# EAGLE board PROJECT[1]. (EAGLE 9.6.2)
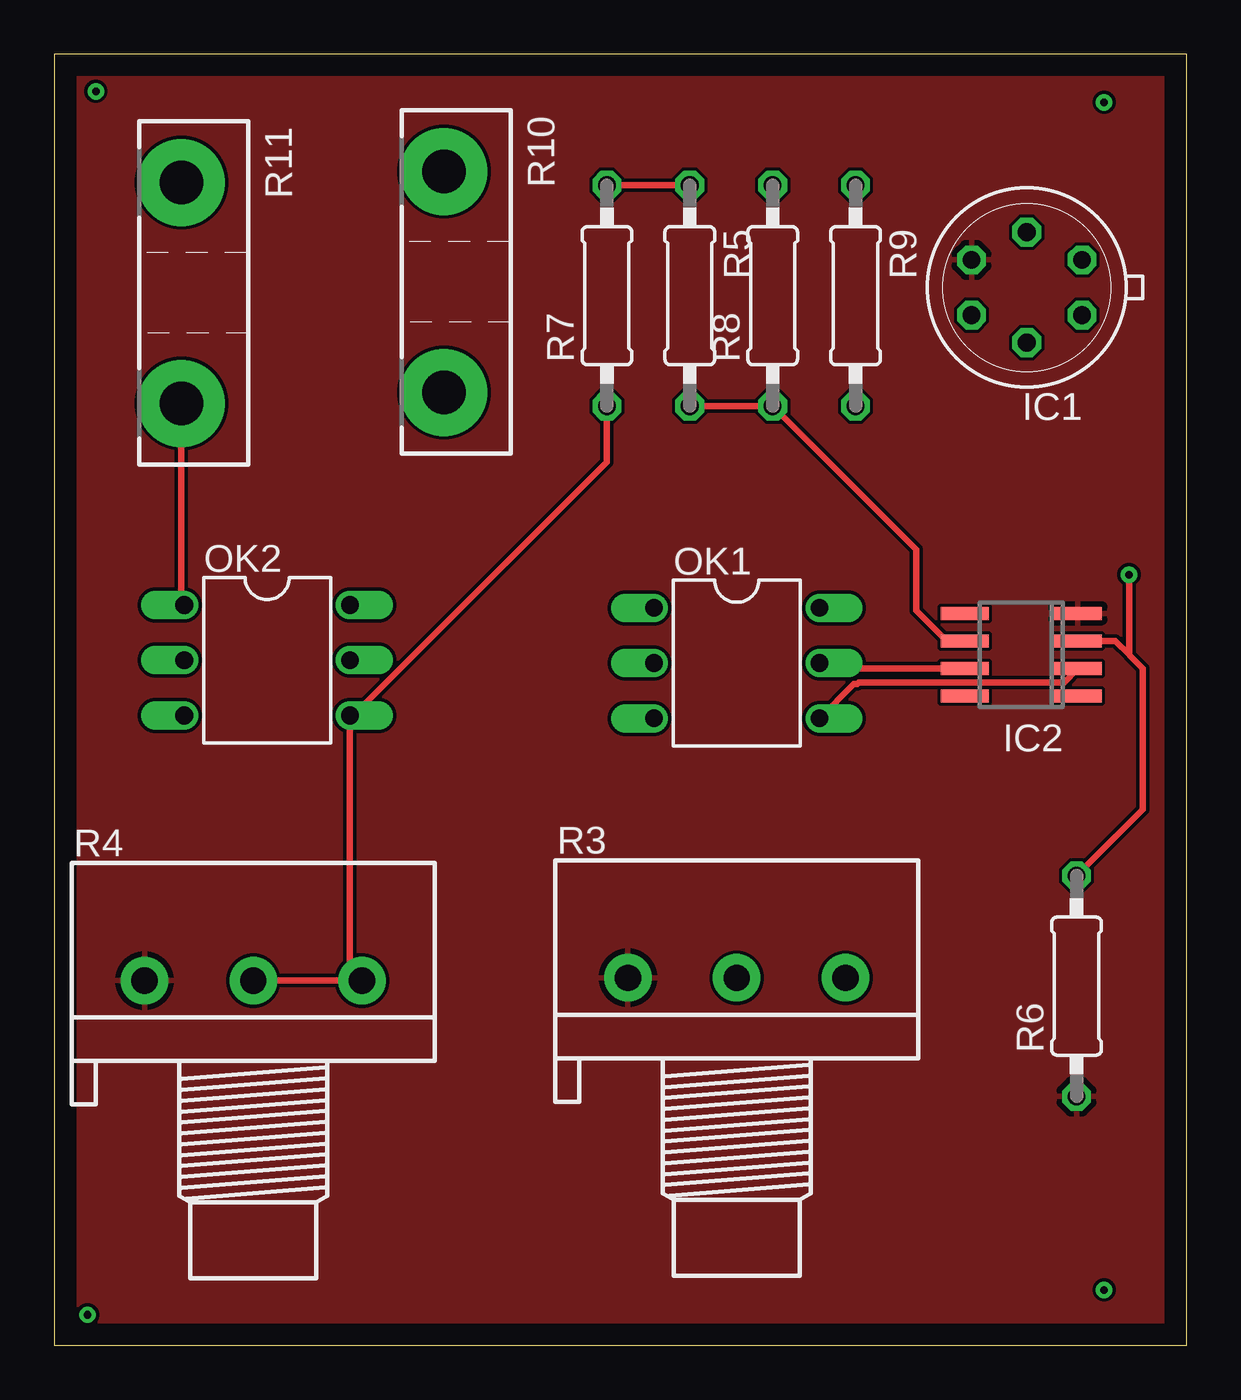
[diagram p0: board, top side]
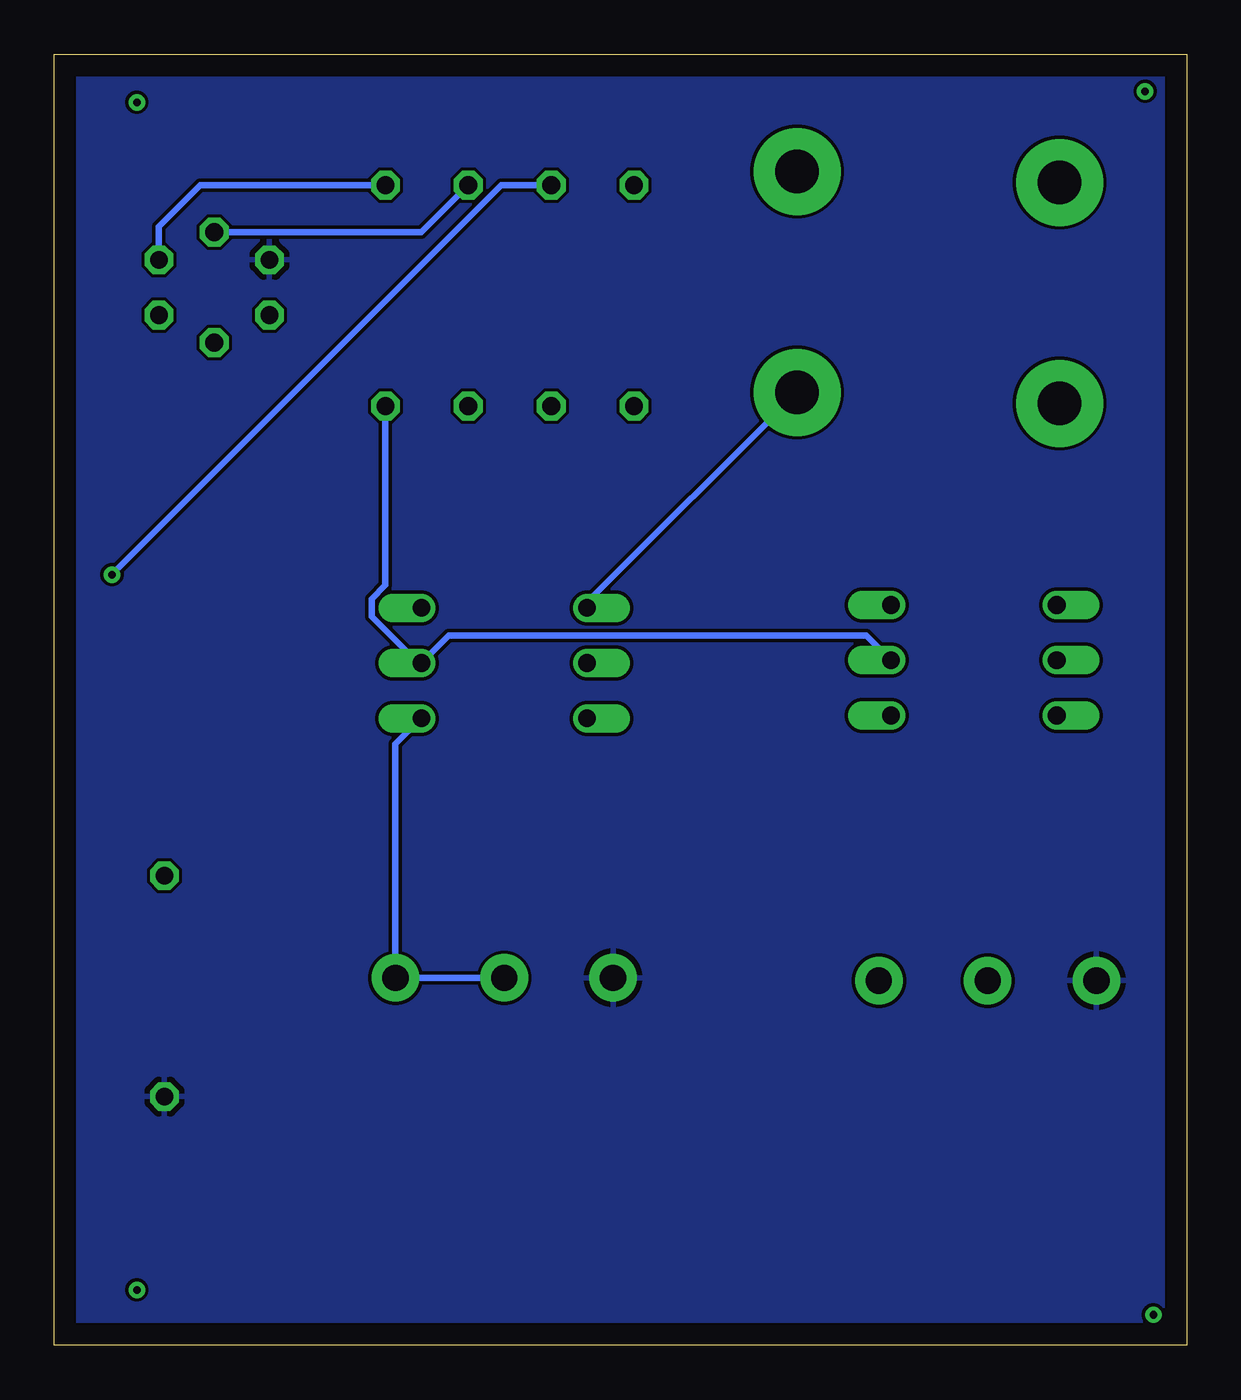
[diagram p1: board, bottom side, seen from below]

Size 52.05 x 59.36 mm. Coordinates in mm from the lower left corner, seen from the top.
Outline: 0,0 52.05,0 52.05,59.36 0,59.36 0,0
Copper layers (1*16): Top 0.035mm / dielectric 1.5mm / Bottom 0.035mm
Design rules "default": minimum track width 6mil, minimum drill 0.35mm, track to track 6mil, track to pad 6mil, pad to pad 6mil, via to via 6mil, smd to smd 6mil, copper to edge 40mil, drill to drill 6mil, minimum pad ring 10mil, minimum via ring 8mil, stop-mask expansion 4mil, vias tented up to drill 0mil, thermal gap 10mil

## Footprints (pad centres in the part's own frame; a part is rotated, then mirrored left to right if it is on the bottom)
TO78 = drill 0.813 octagon: 1 -2.54,-1.27; 2 0,-2.54; 3 2.54,-1.27; 4 2.54,1.27; 5 0,2.54; 6 -2.54,1.27
SO8 = smd 0.6 x 2.2: 1 -1.905,-2.6; 2 -0.635,-2.6; 3 0.635,-2.6; 4 1.905,-2.6; 5 1.905,2.6; 6 0.635,2.6; 7 -0.635,2.6; 8 -1.905,2.6
DIL06 = drill 0.813 offset: 1 -2.54,-3.81; 2 0,-3.81; 3 2.54,-3.81; 4 2.54,3.81; 5 0,3.81; 6 -2.54,3.81
3RP/1610N = drill 1.2 pad 2.184: 1 -5,0; 2 0,0; 3 5,0
0207/10 = drill 0.813 octagon: 1 -5.08,0; 2 5.08,0
TO-247-2V = drill 2 pad 4: 1 -5.08,0; 2 5.08,0

## Placement (x,y rotation side)
IC1  MAT-02H  [TO78]  44.7,48.64 180 top
IC2  AD8519R  [SO8]  44.45,31.75 90 top
OK1  4N35  [DIL06]  31.37,31.37 270 top
OK2  4N35  [DIL06]  9.78,31.5 270 top
R3  [3RP/1610N]  31.37,16.89 0 top
R4  [3RP/1610N]  9.14,16.76 0 top
R5  2.8k  [0207/10]  29.21,48.26 270 top
R6  14k  [0207/10]  46.99,16.51 90 top
R7  1k  [0207/10]  25.4,48.26 90 top
R8  12k  [0207/10]  33.02,48.26 90 top
R9  1.2k  [0207/10]  36.83,48.26 270 top
R10  100K 10W  [TO-247-2V]  17.91,48.89 270 top
R11  100K 10W  [TO-247-2V]  5.84,48.39 270 top

## Library data of the parts
IC1 = linear
IC2 = analog-devices; MPN: AD8519ARZ; OC_FARNELL: 9603840; OC_NEWARK: 19M8912
OK1 OK2 = optocoupler; MF: FAIRCHILD SEMICONDUCTOR; MPN: 4N35; OC_FARNELL: 1328375; OC_NEWARK: 72K9946
R3 R4 = pot
R5-R9 = rcl; SPICEPREFIX: R
R10 R11 = resistor-power; OC_FARNELL: unknown; OC_NEWARK: unknown

## Nets
12V: IC2.7 OK1.5 OK2.5 R9.2
BAT_LV: OK2.4 R4.2 R4.3 R7.1
GND: IC1.3 IC2.4 R3.1 R4.1 R6.1
HV+: R11.1
HV-: OK2.2
MC+: R10.1
MC-: OK1.2
MC_LV: IC2.2 OK1.4 R3.2 R3.3
N$1: OK1.1 R10.2
N$2: OK2.1 R11.2
N$3: IC2.3 R5.1 R6.2 R7.2
N$4: IC2.6 R5.2 R8.1
N$7: IC1.2 R8.2
V_OUT: IC1.1 R9.1

## Tracks (layer width: path | path; a pad name or v marks a point on that pad's centre or on a via)
12V
  Top 0.305: IC2.7 35.43,31.11 OK1.5
  Bottom 0.305: R9.2 36.83,34.94 37.47,34.31 37.47,33.51 35.33,31.37 OK1.5 33.91,32.64 14.73,32.64 OK2.5
BAT_LV
  Top 0.305: R4.2 R4.3 13.59,17.32 OK2.4 13.74,28.96 25.4,40.62 R7.1
GND
  pour Top: 54.61,62.23 -2.54,62.23 -2.54,-2.54 54.61,-2.54
  pour Bottom: 55.88,63.5 -3.81,63.5 -3.81,-3.81 55.88,-3.81
MC_LV
  Top 0.305: IC2.2 46.41,30.48 36.98,30.48 36.9,30.4 36.75,30.4 OK1.4
  Bottom 0.305: R3.2 R3.3 36.37,27.64 OK1.4
N$1
  Bottom 0.305: R10.2 27.56,34.16 OK1.1
N$2
  Top 0.305: R11.2 5.84,34.16 OK2.1
N$3  (via drill 0.35)
  Top 0.305: R7.2 R5.1 | IC2.3 48.77,32.38 49.4,31.75 | R6.2 50.04,24.64 50.04,31.11 49.47,31.69 49.4,31.75 | v49.4,35.43 49.4,31.75
  Bottom 0.305: R5.1 31.5,53.34 v49.4,35.43
N$4
  Top 0.305: R5.2 R8.1 39.62,36.58 39.62,33.78 41.02,32.38 IC2.6
N$5  (via drill 0.35)
  other vias: 48.26,2.54
N$6  (via drill 0.35)
  other vias: 48.26,57.15
N$7
  Bottom 0.305: R8.2 35.18,51.18 IC1.2
N$8  (via drill 0.35)
  other vias: 1.91,57.66
N$9  (via drill 0.35)
  other vias: 1.52,1.4
V_OUT
  Bottom 0.305: R9.1 45.34,53.34 47.24,51.43 IC1.1